# Altium PCB T245_1v1.PcbDoc (part 1 of 2)
Units mm, origin at the board's own origin, x right, y up, seen from the top; angles counter-clockwise.
Board outline 126 x 115 mm, 2 copper layers (Top Layer, Bottom Layer); 137 components, 88 nets, 465 pads, 274 vias.
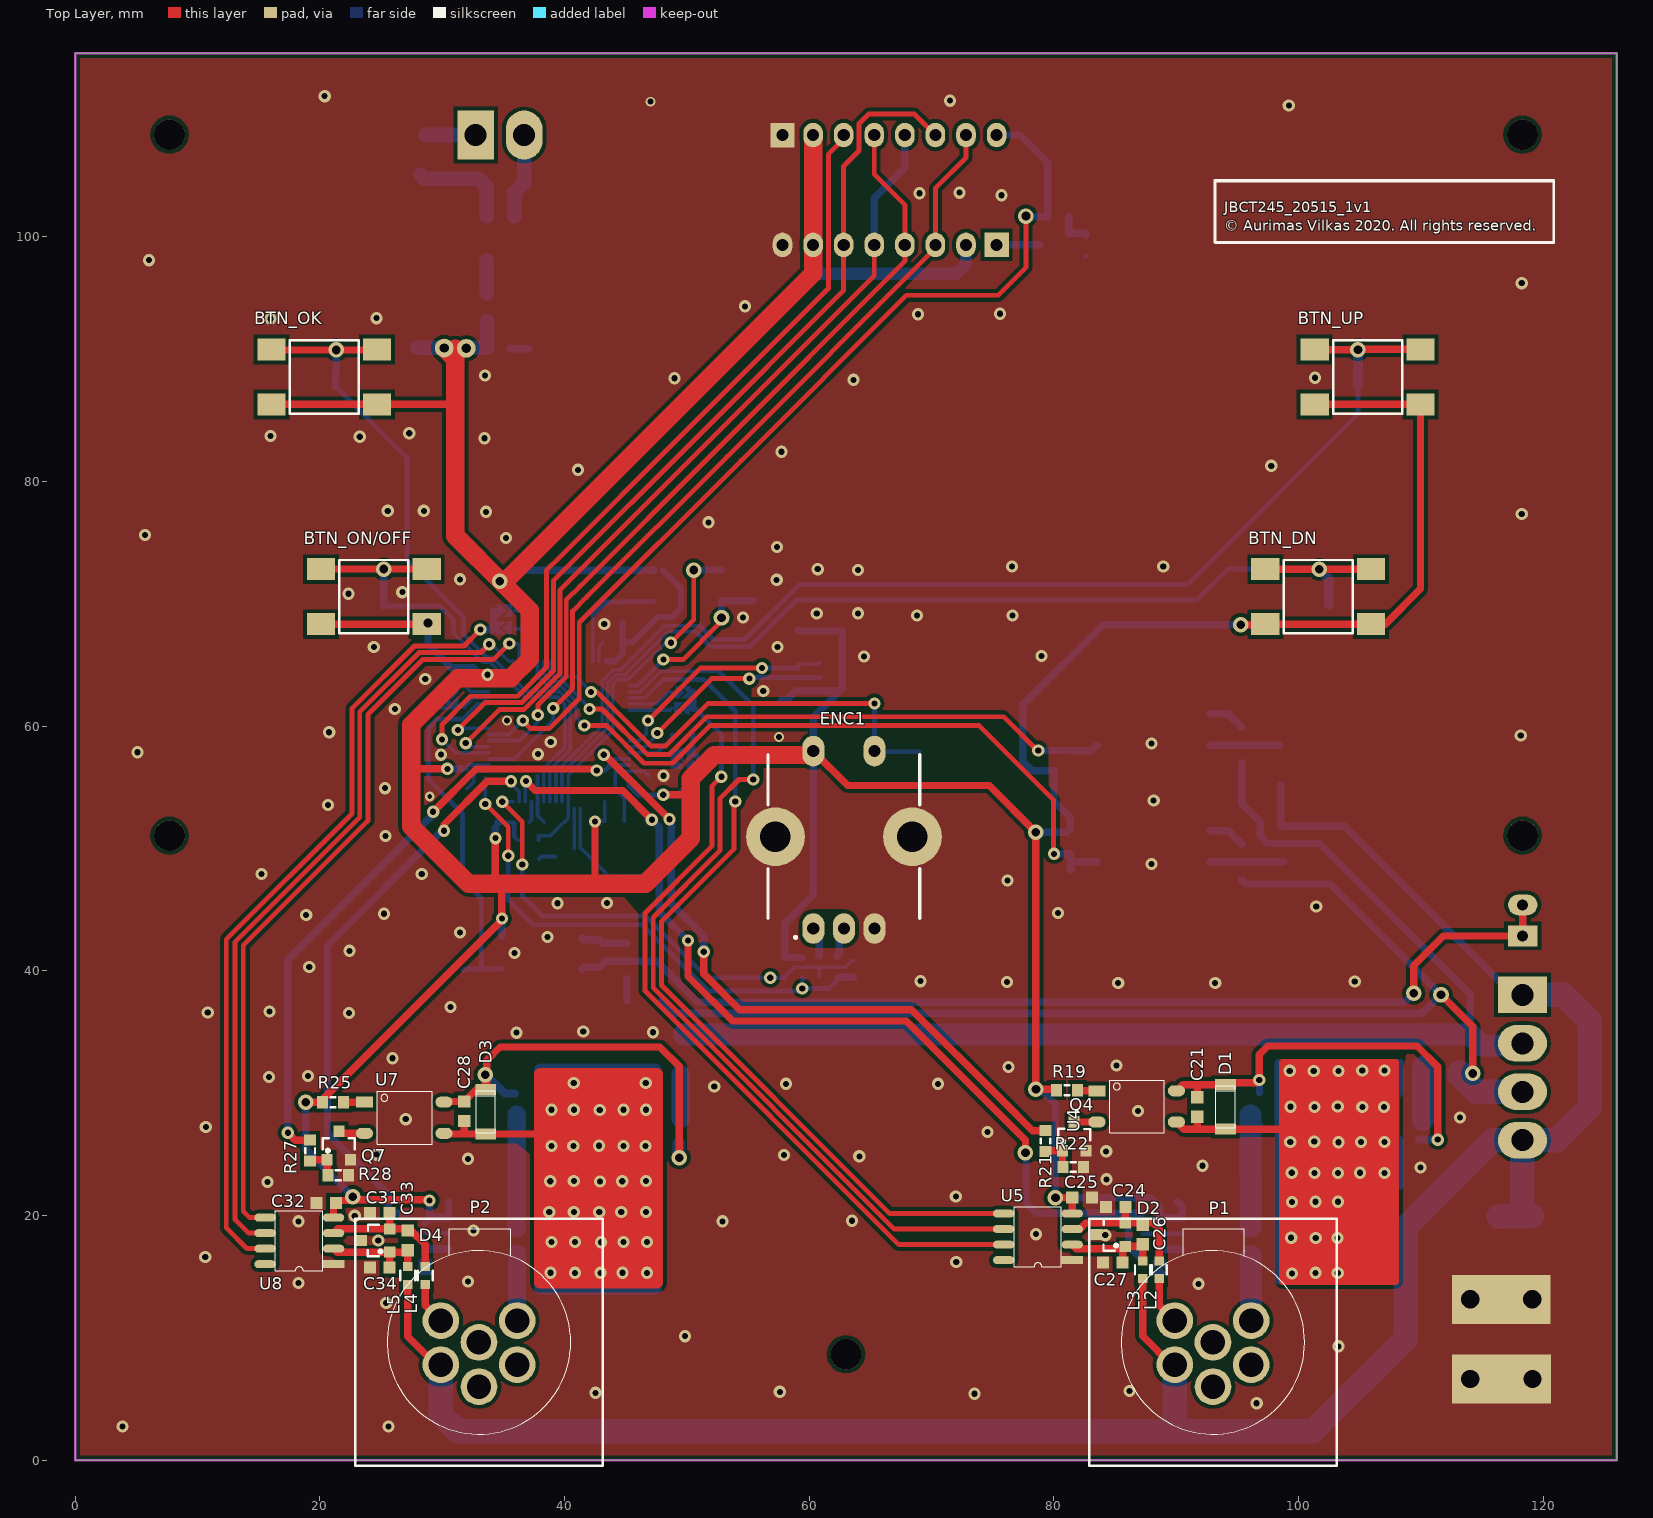
[diagram p0: Top Layer view]
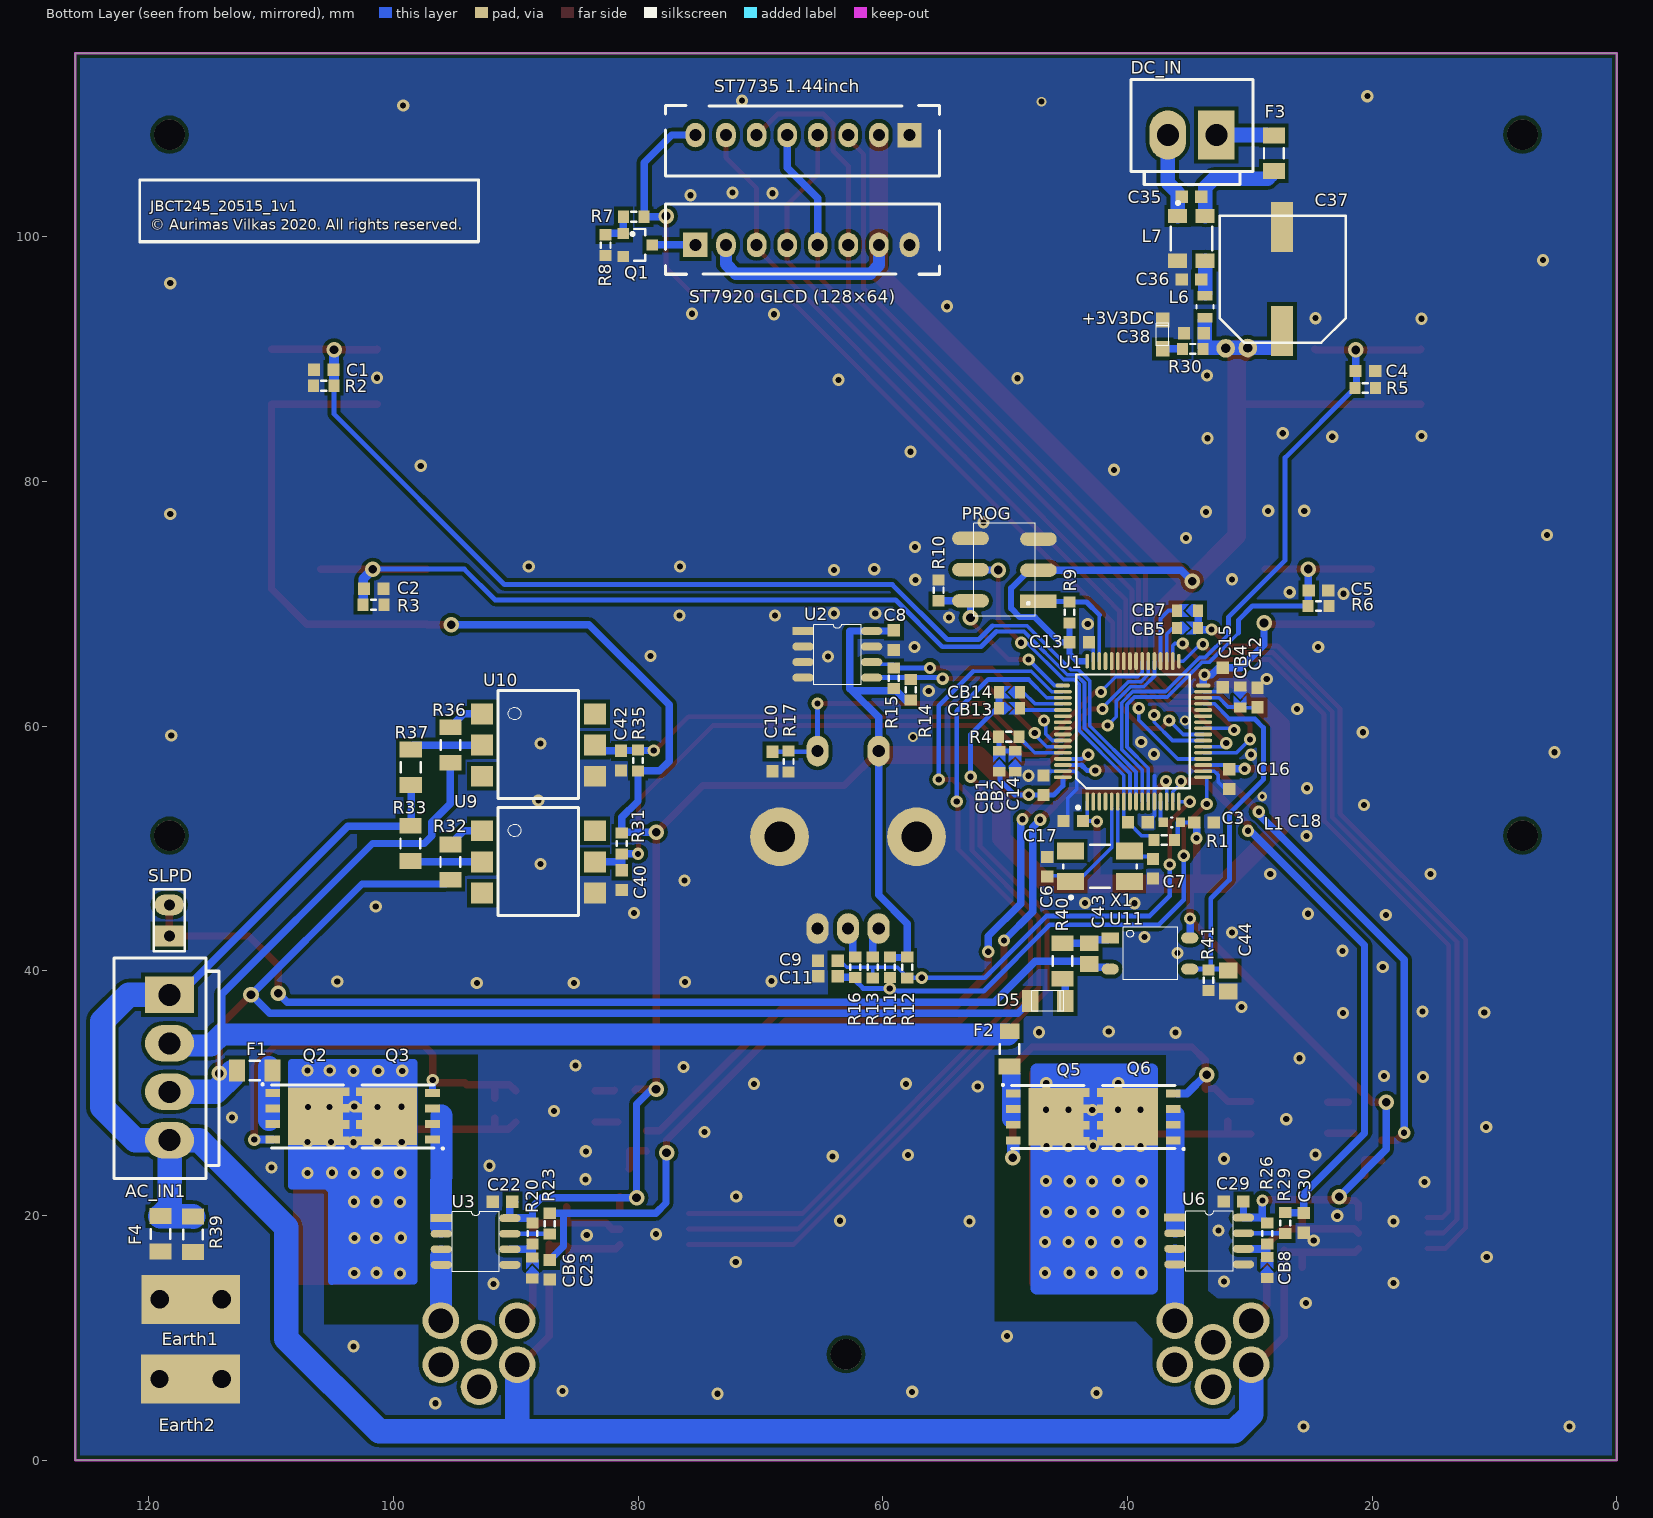
[diagram p1: Bottom Layer view, seen from below]
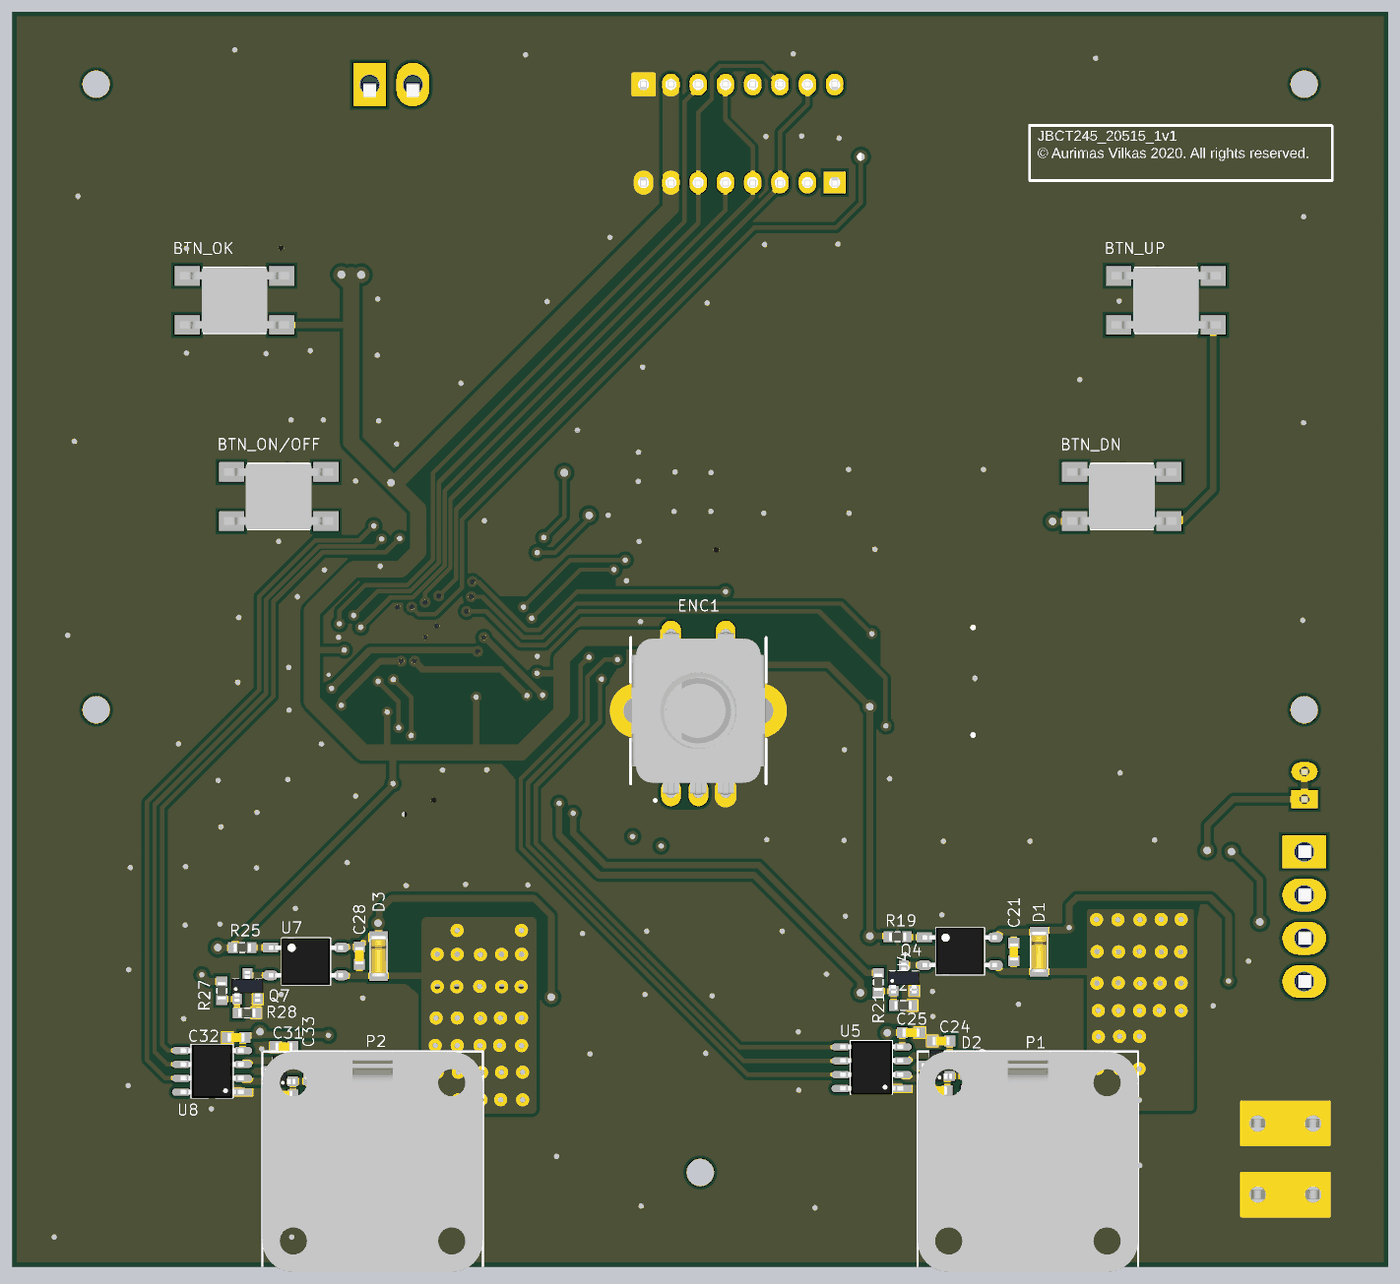
[diagram p3: 3D render of the assembled board from above, using the file's embedded part models]
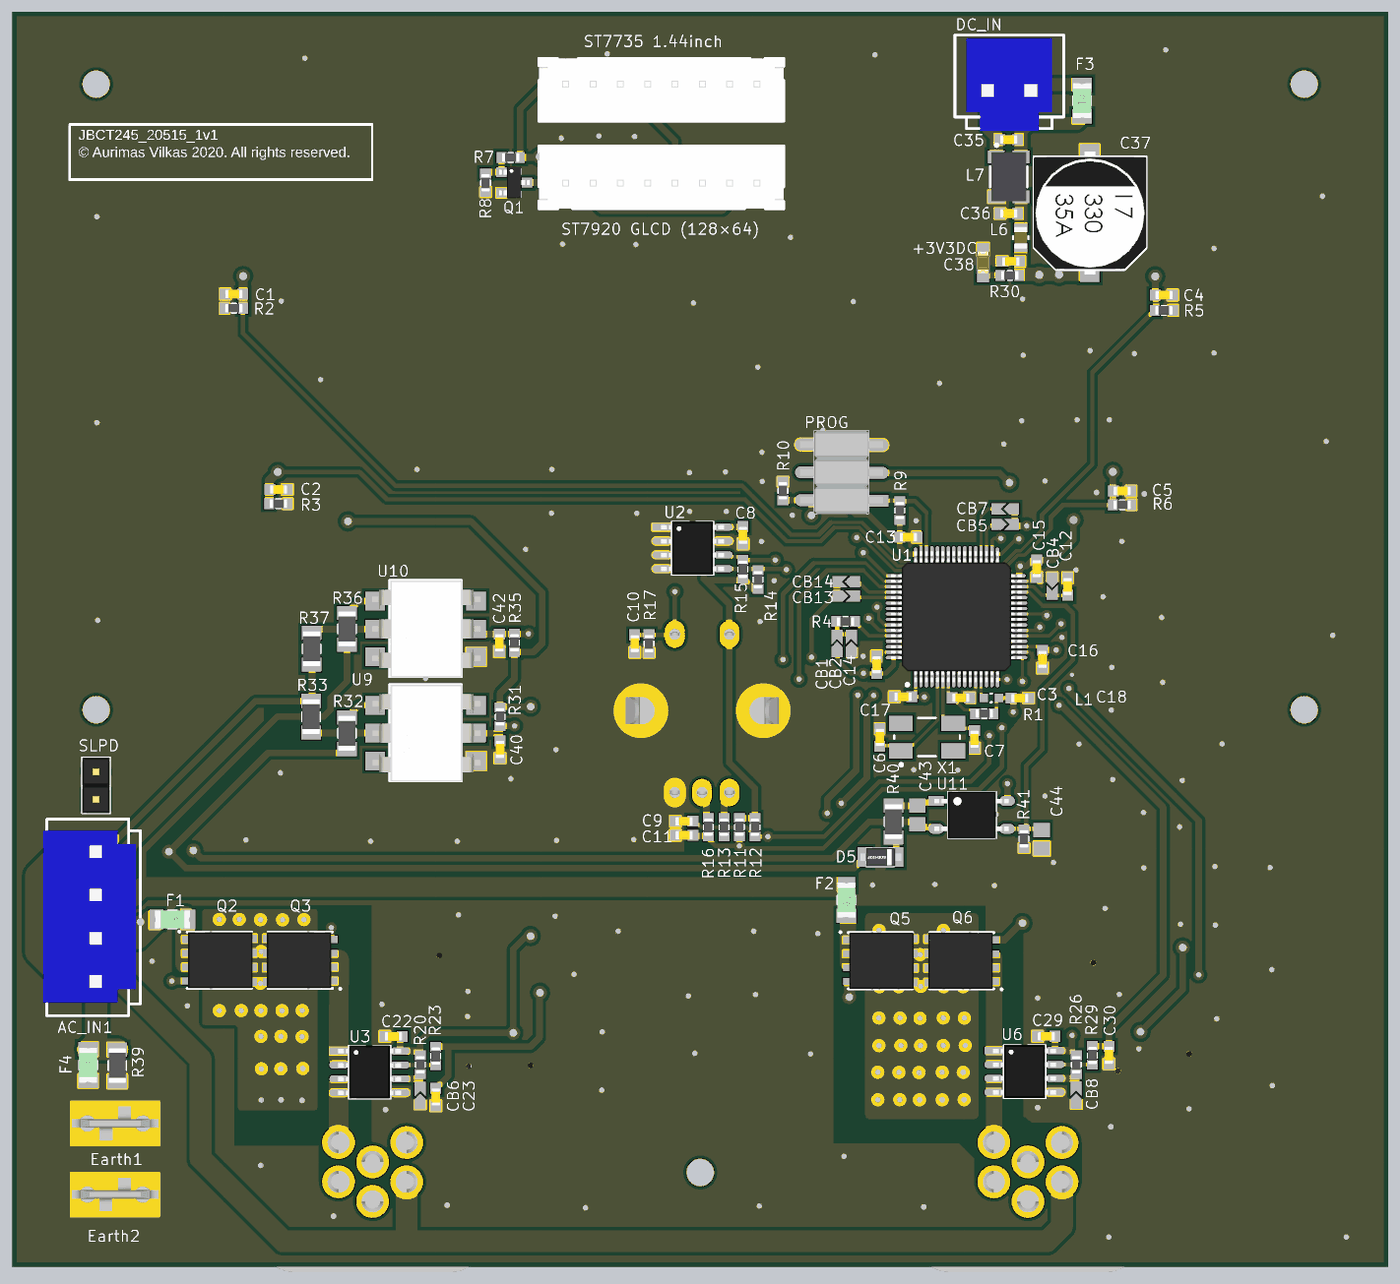
[diagram p4: 3D render of the assembled board from below, using the file's embedded part models]

## Layer stack, top to bottom
Top Solder: solder mask 0.0102, Solder Resist, Dk 3.5
Top Layer: signal copper 0.0356
Dielectric 1: dielectric 0.32, FR-4, Dk 4.8
Bottom Layer: signal copper 0.0356
Bottom Solder: solder mask 0.0102, Solder Resist, Dk 3.5

## Board outline
0,0 126,0 126,115 0,115

## Design rules (kind name [scope] priority, off if disabled: settings)
Clearance [All] p1: gap=0.3 ignorepadtopadclearanceinfootprint=FALSE
ComponentClearance [All] p1: gap=0 collisioncheckmode=3 verticalgap=2540 showdistances=FALSE
Height [All] p1: minheight=0 maxheight=50 prefheight=12.7
PolygonConnect [All] p1: connectstyle=Direct reliefconductorwidth=0.254 reliefentries=4 polygonreliefangle="90 Angle" airgapwidth=0.254
RoutingVias [All] p1: holewidth=0.711 width=1.27 viastyle="Through Hole" minholewidth=0.711 minwidth=1.27 maxholewidth=0.711 maxwidth=1.27
SolderMaskExpansion [All] p1: expansion=0.102
UnRoutedNet [All] p1: checkbadconnections=TRUE
Width [All] p1: maxlimit=10 minlimit=0.1 preferedwidth=0.3 minimp=50.000000 maximp=50.000000 favimp=50.000000
27 further rules are at their usual default settings.

## Classes and differential pairs
component class T245_1v1: AC_IN1 C43 C44 D5 DC_IN Earth1 Earth2 F4 R39 R40 R41 SLPD U11
component class Power_Supply: +3V3DC C35 C36 C37 C38 C40 C42 F3 L6 L7 LED1 R30 R31 R32 R33 R35 R36 R37 U9 U10
component class Power_Driver_2: C28 C29 C30 C31 C32 C33 C34 CB8 D3 D4 F2 L4 L5 P2 Q5 Q6 Q7 R25 R26 R27 R28 R29 U6 U7 U8
component class Power_Driver_1: C21 C22 C23 C24 C25 C26 C27 CB6 D1 D2 F1 L2 L3 P1 Q2 Q3 Q4 R19 R20 R21 R22 R23 U3 U4 U5
component class MCU: BTN_DN BTN_OK BTN_ON/OFF BTN_UP C1 C2 C3 C4 C5 C6 C7 C8 C9 C10 C11 C12 C13 C14 C15 C16 C17 C18 CB1 CB2 CB4 CB5 CB7 CB13 CB14 ENC1 L1 PROG Q1 R1 R2 R3 R4 R5 R6 R7 R8 R9 R10 R11 R12 R13 R14 R15 R16 R17 "ST7735 1.44inch" "ST7920 GLCD (128×64)" U1 U2 X1

## Components (designator, comment, footprint, x,y, rotation, side; value= is the part's Value field where it differs from the comment)
+3V3DC "Green LED" LED_GRN 37.11,92.02 r90 bottom
AC_IN1 "HDR1X4" HDR1X4_3M96V 118.3,32.09 r270 bottom
BTN_DN "Button" PB-6X6mm 101.6,70.58 r180 top
BTN_OK "Button" PB-6X6mm 20.35,88.55 r180 top
BTN_ON/OFF "Button" PB-6X6mm 24.4,70.58 r180 top
BTN_UP "Button" PB-6X6mm 105.64,88.55 r180 top
C1 "10nF" CAPC1608N 105.7,89.13 r0 bottom
C2 "10nF" CAPC1608N 101.6,71.23 r180 bottom
C3 "100nF" CAPC1608N 39.137,52.14 r0 bottom
C4 "10nF" CAPC1608N 20.54,89.04 r180 bottom
C5 "10nF" CAPC1608N 24.37,71.09 r180 bottom
C6 "18p" CAPC1608N 46.557,48.51 r270 bottom
C7 "18p" CAPC1608N 37.897,48.34 r90 bottom
C8 "100nF" CAPC1608N 59.09,67.03 r90 bottom
C9 "10nF" CAPC1608N 64.48,40.83 r0 bottom
C10 "10nF" CAPC1608N 69,57.11 r270 bottom
C11 "10nF" CAPC1608N 64.47,39.55 r0 bottom
C12 "4u7F" CAPC1608N 29.36,62.34 r270 bottom
C13 "100nF" CAPC1608N 43.937,66.86 r0 bottom
C14 "100nF" CAPC1608N 46.857,55.17 r270 bottom
C15 "100nF" CAPC1608N 32.197,63.97 r90 bottom
C16 "100nF" CAPC1608N 31.67,55.67 r90 bottom
C17 "100nF" CAPC1608N 44.43,52.24 r180 bottom
C18 "100nF" CAPC1608N 33.737,52.12 r0 bottom
C21 "100nF" CAPC1608N 91.71,28.86 r90 top
C22 "100nF" CAPC1608N 91.08,21.12 r180 bottom
C23 "10nF" CAPC1608N 87.21,15.56 r270 bottom
C24 "100nF" CAPC1608N 85.05,20.7 r180 top
C25 "100nF" CAPC1608N 82.3,21.47 r0 top
C26 "10nF" CAPC1608N 87.26,18.44 r270 top
C27 "100nF" CAPC1608N 84.81,16.16 r0 top
C28 "100nF" CAPC1608N 31.79,28.52 r90 top
C29 "100nF" CAPC1608N 31.32,21.13 r180 bottom
C30 "10nF" CAPC1608N 25.58,19.39 r270 bottom
C31 "100nF" CAPC1608N 24.89,20.18 r180 top
C32 "100nF" CAPC1608N 20.51,21.02 r180 top
C33 "10nF" CAPC1608N 27.17,17.96 r270 top
C34 "100nF" CAPC1608N 24.89,15.75 r0 top
C35 "100nF" CAPC1608N 34.76,103.28 r180 bottom
C36 "100nF" CAPC1608N 34.76,96.51 r180 bottom
C37 "470uF 25V" 10X10.5 27.35,96.55 r270 bottom
C38 "100nF" CAPC1608N 34.56,92.12 r180 bottom
C40 "10nF" CAPC1608N 81.33,47.41 r270 bottom
C42 "10nF" CAPC1608N 81.39,57.18 r270 bottom
C43 "1uF 50V" CAPC2012N 43.11,41.4 r270 bottom
C44 "1uF 50V" CAPC2012N 31.74,39.17 r270 bottom
CB1 "Open" CB_0603 50.47,57.13 r270 bottom
CB2 "Closed" CB_0603 49.17,57.13 r270 bottom
CB4 "Open" CB_0603 30.787,62.37 r90 bottom
CB5 "Closed" CB_0603 35.07,68.02 r0 bottom
CB6 "Open" CB_0603 88.64,15.71 r270 bottom
CB7 "Open" CB_0603 35.07,69.45 r180 bottom
CB8 "Open" CB_0603 28.58,15.75 r270 bottom
CB13 "Open" CB_0603 49.62,61.46 r0 bottom
CB14 "Closed" CB_0603 49.63,62.77 r180 bottom
D1 "12V" SOD-80C 94.02,28.87 r90 top
D2 "NUP2105LT1G" SOT23-3 85.83,17.48 r90 top
D3 "12V" SOD-80C 33.55,28.48 r90 top
D4 "NUP2105LT1G" SOT23-3 25.7,17 r90 top
D5 "1N4148W" SOD-123F 46.5,37.54 r0 bottom
DC_IN "HDR1X2" HDR1X2_3M96V 34.71,108.32 r0 bottom
Earth1 "Blade Header" "Blade header" 116.57,13.14 r180 bottom
Earth2 "Blade Header" "Blade header" 116.578,6.63 r180 bottom
ENC1 "PEC11R-4225F-S0024" PEC12R-4XXXF-SXXXX_1 62.83,50.96 r0 top
F1 "8A" 1206F#1 111.33,31.84 r0 bottom
F2 "8A" 1206F#2 49.62,33.61 r90 bottom
F3 "1.5A Fuse" 1206F#1 28.03,106.84 r270 bottom
F4 "1.5A Fuse" 1206F#1 119.04,18.49 r270 bottom
L1 "BLM18A" 0603L 36.36,52.13 r0 bottom
L2 "BLM18PG471SN1D" LL0603\2P 88.61,15.56 r270 top
L3 "BLM18PG471SN1D" LL0603\2P 87.25,15.56 r90 top
L4 "BLM18PG471SN1D" LL0603\2P 28.61,15.09 r270 top
L5 "BLM18PG471SN1D" LL0603\2P 27.17,15.09 r90 top
L6 "220R 2A" LL0805\2P 33.66,94.28 r270 bottom
L7 "300nH 2A" 1812_CM_WE 34.76,99.87 r270 bottom
P1 "6 Pin circular conn" RPC1-12RB-6P(71) 93,8.7 r0 top
P2 "6 Pin circular conn" RPC1-12RB-6P(71) 33,8.7 r0 top
PROG "PROG" B6B_SMT 50.047,72.77 r0 bottom
Q1 "FMMT493ATA" SOT23-3 81.2,100.29 r270 bottom
Q2 "BSC070N10NS3GATMA1" PG-TDSON-8 106.35,28.1 r270 bottom
Q3 "BSC070N10NS3GATMA1" PG-TDSON-8 100.3,28.1 r90 bottom
Q4 "FMMT493ATA" SOT23-3 80.7,25.29 r0 top
Q5 "BSC070N10NS3GATMA1" PG-TDSON-8 45.83,28.05 r270 bottom
Q6 "BSC070N10NS3GATMA1" PG-TDSON-8 39.74,28.05 r90 bottom
Q7 "FMMT493ATA" SOT23-3 20.59,24.54 r0 top
R1 "100k" RESC1608N 36.99,50.69 r180 bottom
R2 "10k" RESC1608N 105.7,87.83 r180 bottom
R3 "10k" RESC1608N 101.62,69.93 r0 bottom
R4 "100k" RESC1608N 49.69,59.13 r180 bottom
R5 "10k" RESC1608N 20.55,87.64 r0 bottom
R6 "10k" RESC1608N 24.37,69.82 r0 bottom
R7 "220R" RESC1608N 80.35,101.64 r0 bottom
R8 "1k" RESC1608N 82.65,99.32 r90 bottom
R9 "10k" RESC1608N 44.73,69.3 r270 bottom
R10 "10k" RESC1608N 55.43,71.1 r270 bottom
R11 "10k" RESC1608N 59.41,40.29 r90 bottom
R12 "10k" RESC1608N 57.99,40.28 r90 bottom
R13 "10k" RESC1608N 60.82,40.28 r90 bottom
R14 "10k" RESC1608N 59.09,63.91 r270 bottom
R15 "10k" RESC1608N 57.71,62.97 r270 bottom
R16 "10k" RESC1608N 62.25,40.29 r90 bottom
R17 "10k" RESC1608N 67.69,57.11 r90 bottom
R19 "68R" RESC1608N 81.07,30.24 r180 top
R20 "10k" RESC1608N 88.63,18.53 r270 bottom
R21 "220R" RESC1608N 79.31,26.08 r270 top
R22 "1k" RESC1608N 81.57,23.96 r180 top
R23 "100R" RESC1608N 87.21,19.33 r270 bottom
R25 "68R" RESC1608N 21.07,29.25 r180 top
R26 "10k" RESC1608N 28.57,18.53 r270 bottom
R27 "220R" RESC1608N 19.19,25.3 r270 top
R28 "1k" RESC1608N 21.5,23.28 r180 top
R29 "100R" RESC1608N 27.09,19.38 r270 bottom
R30 "68R" RESC1608N 34.66,90.84 r180 bottom
R31 "10k" RESC1608N 81.33,50.4 r90 bottom
R32 "1k5 1/2W" RESC3216N 95.35,48.89 r90 bottom
R33 "1k5 1/2W" RESC3216N 98.62,50.41 r270 bottom
R35 "10k" RESC1608N 80.01,57.19 r270 bottom
R36 "1k5 1/2W" RESC3216N 95.34,58.46 r90 bottom
R37 "1k5 1/2W" RESC3216N 98.58,56.63 r90 bottom
R39 "10M" RESC3216N 116.37,18.45 r90 bottom
R40 "1k5 1/2W" RESC3216N 45.3,40.8 r90 bottom
R41 "10k" RESC1608N 33.36,39.22 r90 bottom
SLPD "Sleep_Det" HDR1X2_2.54mm 118.32,42.85 r90 bottom
"ST7735 1.44inch" "ST7735 1.44inch" "B8B-XH-A (LF)(SN)" 57.81,108.32 r0 bottom
"ST7920 GLCD (128×64)" "ST7920 GLCD (128×64)" "B8B-XH-A (LF)(SN)" 75.31,99.34 r180 bottom
U1 "STM32F446RCT6" LQFP-64N 39.537,59.57 r90 bottom
U2 "24LC256-E/SN" SOIC-8 63.708,65.869 r180 bottom
U3 "ACS711KLCTR-12AB-T" SOIC-8 93.28,17.87 r180 bottom
U4 "VOM1271T" SOP-4 86.76,28.915 r0 top
U5 "MAX31855KASA+T" SOIC-8 78.69,18.25 r180 top
U6 "ACS711KLCTR-12AB-T" SOIC-8 33.31,17.91 r180 bottom
U7 "VOM1271T" SOP-4 26.89,27.99 r0 top
U8 "MAX31855KASA+T" SOIC-8 18.31,17.92 r180 top
U9 "H11AA1SR2M" SMDIP-6 88.06,48.9 r180 bottom
U10 "H11AA1SR2M" SMDIP-6 88.07,58.45 r180 bottom
U11 "TLP185SE" SOP-4 38.15,41.415 r180 bottom
X1 "8 MHz" 2SMX-3SMXB 42.237,48.54 r180 bottom

## Footprints (in the part's own frame and the unit in brackets; to place one, negate y for a bottom-side part, rotate by r counter-clockwise, add the part's x,y. Pads: shape width x height; smd on the part's side, far side on the other; paste and mask are expansions set on the pad)
2SMX-3SMXB [mm] "Quartz Crystal, SM; Body 6.0 x 3.5 mm (LxW)"
  rect 2.2x1.4 smd: 1(-2.4,-1.25) 2(2.4,-1.25) 3(2.4,1.25) 4(-2.4,1.25)
  silkscreen extent -3,-2.66 3,1.75, body extent -3.01,-1.76 3.01,1.76, height 1
10X10.5 [mm] "MCVVT025M471GB3L"
  rect 4.1x1.8 smd: 1(4.263,0) 2(-4.262,0)
  silkscreen extent -5.17,-5.11 5.2,5.19, body extent -5.65,-5.11 5.65,5.19, height 10.61
0603L [mil] "Bead 0603L"
  rect 30x30 smd: 1(27.5,0) 2(-27.5,0)
  silkscreen extent -2,-16 2,16, body extent -34,-19 34,19, height 24
1206F#1 [mm] "Fuse, Surface Mount, 1.5 A, 32 V, Fast Acting, 1206"
  rect 1.3x1.8 smd: 1(-1.45,0) 2(1.45,0)
  silkscreen extent -0.4,-0.8 0.4,0.8, body extent -1.6,-0.83 1.6,0.83, height 0.56
1206F#2 [mm] "Fuse, Surface Mount, 1.5 A, 32 V, Fast Acting, 1206"
  rect 1.3x1.8 smd: 1(-1.45,0)
  rect 1.3x1.6 smd: 2(1.45,0)
  silkscreen extent -0.4,-0.8 0.4,0.8, body extent -1.6,-0.83 1.6,0.83, height 0.56
1812_CM_WE [mm] "744235900 -  Filter, Line, Common Mode, 300 nH, WE-CNSW Series, 90 ohm, 2 A, 4.5mm x 3.2mm x 2.8mm"
  rect 1.15x1.55 smd: 1(-1.825,-1.125) 2(1.825,-1.125) 3(1.825,1.125) 4(-1.825,1.125)
  silkscreen extent -3.02,-1.7 0.95,1.7, body extent -2.25,-1.6 2.25,1.6, height 2.84
B6B_SMT [mm]
  rect 3x1.1 smd: 1(-2.775,2.575)
  oval 3x1.1 smd: 2(2.775,2.525) 3(-2.775,0.025) 4(2.775,-0.025) 5(-2.775,-2.525) 6(2.775,-2.575)
  silkscreen extent -2.52,-3.83 2.52,3.79, body extent -3.81,-3.83 3.81,3.79, height 10.2
"B8B-XH-A (LF)(SN)" [mm]
  rect 2x2 hole 1: 1(0,0)
  oval 1.6x2 hole 1: 2(2.5,0) 3(5,0) 4(7.5,0) 5(10,0) 6(12.5,0) 7(15,0) 8(17.5,0)
  silkscreen extent -2.45,-2.4 19.95,3.35, body extent -2.45,-2.4 19.95,3.35, height 7.4
"Blade header" [mm]
  rect 3x4 hole 1.5: 1(-2.537,0) 1(2.538,0)
  rect 3x4 all layers, no hole: 1(0.013,0)
  body extent -3.95,-1.54 3.97,1.55, height 10.6
CAPC1608N [mm] "Chip Capacitor, Body 1.6x0.8mm(0603), IPC Medium Density"
  rect 1x1 smd: 1(-0.8,0) 2(0.8,0)
  body extent -0.8,-0.4 0.8,0.4, height 0.55
CAPC2012N [mm] "Chip Capacitor, Body 2.0x1.3mm(C0805), IPC Medium Density"
  rect 1.3x1.5 smd: 1(-0.85,0) 2(0.85,0)
  body extent -1.1,-0.72 1.1,0.72, height 1.1
CB_0603 [mil] "Jumper"
  rect 32x40 smd: 1(33.75,0) 2(-33.75,0)
  Top Layer region: -26.25,0 -16.25,0 3.75,-20 -26.25,-20
  Top Layer region: -26.25,0 -16.25,0 3.75,20 -26.25,20
  Top Layer region: 23.75,20 13.75,20 -6.25,0 13.75,-20 23.75,-20
HDR1X2_2.54mm [mm] "Straight pin header, 2.54mm pitch, hole 0.9mm"
  rect 1.7x2.4 hole 0.9: 1(0,0)
  oval 1.7x2.4 hole 0.9: 2(2.54,0)
  silkscreen extent -1.27,-1.27 3.81,1.27, body extent -1.29,-1.27 3.79,1.27, height 8.49
HDR1X2_3M96V [mm]
  rect 3x4 hole 1.8: 1(-1.98,0)
  oval 3x4 hole 1.8: 2(1.98,0)
  silkscreen extent -4.98,-4.53 4.98,4.03, body extent -3.93,-4.25 3.93,4.25, height 10.9
HDR1X4_3M96V [mm]
  rect 3x4 hole 1.8: 1(-5.94,0)
  oval 3x4 hole 1.8: 2(-1.98,0) 3(1.98,0) 4(5.94,0)
  silkscreen extent -8.94,-4.53 9.06,4.03, body extent -7.89,-4.86 7.89,3.64, height 10.9
LED_GRN [mm] "0805"
  rect 1.25x1.1 smd: 1(-1.175,0) 2(1.175,0)
  silkscreen extent -0.91,-0.5 0.9,0.53, body extent -1.01,-0.63 1.01,0.62, height 1.1
LL0603\2P [mm]
  rect 0.75x0.8 smd: 1(-0.725,0) 2(0.725,0)
  silkscreen extent -0.38,-0.63 0.38,0.63, body extent -0.8,-0.4 0.8,0.4, height 0.4
LL0805\2P [mm]
  rect 0.8x1.25 smd: 1(-0.9,0) 2(0.9,0)
  silkscreen extent -0.15,-0.7 0.15,0.7, body extent -1,-0.6 1,0.6, height 0.95
LQFP-64N [mm] "STM32F446RET6"
  rect 1.475x0.3 smd: 1(-5.738,3.75)
  oval 1.475x0.3 smd: 2(-5.738,3.25) 3(-5.738,2.75) 4(-5.738,2.25) 5(-5.738,1.75) 6(-5.738,1.25) 7(-5.738,0.75) 8(-5.738,0.25) 9(-5.738,-0.25) 10(-5.738,-0.75) 11(-5.738,-1.25) 12(-5.738,-1.75) 13(-5.738,-2.25) 14(-5.738,-2.75) 15(-5.738,-3.25) 16(-5.738,-3.75) 34(5.738,-3.25) 35(5.738,-2.75) 36(5.738,-2.25) 37(5.738,-1.75) 38(5.738,-1.25) 39(5.738,-0.75) 40(5.738,-0.25) 41(5.738,0.25) 42(5.738,0.75) 43(5.738,1.25) 44(5.738,1.75) 45(5.738,2.25) 46(5.738,2.75) 47(5.738,3.25)
  oval 0.3x1.475 smd: 17(-3.75,-5.738) 18(-3.25,-5.738) 19(-2.75,-5.738) 20(-2.25,-5.738) 21(-1.75,-5.738) 22(-1.25,-5.738) 23(-0.75,-5.738) 24(-0.25,-5.738) 25(0.25,-5.738) 26(0.75,-5.738) 27(1.25,-5.738) 28(1.75,-5.738) 29(2.25,-5.738) 30(2.75,-5.738) 31(3.25,-5.738) 50(3.25,5.738) 51(2.75,5.738) 52(2.25,5.738) 53(1.75,5.738) 54(1.25,5.738) 55(0.75,5.738) 56(0.25,5.738) 57(-0.25,5.738) 58(-0.75,5.738) 59(-1.25,5.738) 60(-1.75,5.738) 61(-2.25,5.738) 62(-2.75,5.738) 63(-3.25,5.738) 64(-3.75,5.738)
  oval 0.3x1.2 smd: 32(3.75,-5.738) 49(3.75,5.738)
  oval 1.2x0.3 smd: 33(5.738,-3.75) 48(5.738,3.75)
  silkscreen extent -6.35,-4.65 4.65,4.65, body extent -6,-6 6,6, height 1.6
PB-6X6mm [mm] "Surface Mounting Type Tact Switch, 4-Leads, Body 6x6mm, Height 4.5mm Black"
  rect 2.3x1.8 smd: 1(4.325,2.25) 2(4.325,-2.25) 3(-4.325,-2.25) 4(-4.325,2.25)
  silkscreen extent -2.83,-3 2.81,3, body extent -5,-3 5,3, height 4.71
PEC12R-4XXXF-SXXXX_1 [mm]
  oval 1.8x2.5 hole 1: 1(-2.5,-7.5) 2(2.5,-7.5) 3(0,-7.5) 4(-2.5,7) 5(2.5,7)
  round 4.8 hole 2.5: 6(5.6,0) 7(-5.6,0)
  silkscreen extent -6.2,-8.31 6.2,6.7, body extent -7,-7.7 7,7.2, height 31.7
PG-TDSON-8 [mm]
  rect 0.65x1.2 smd: 1(1.905,-3.5) 2(-1.905,-3.5) 2(-0.635,-3.5) 2(0.635,-3.5)
  rect 0.7x0.5 smd: 3(-2,2.5) 3(-0.665,2.5) 3(0.665,2.5) 3(2,2.5)
  rect 4.7x4.5 smd: 3(0,0)
  silkscreen extent -2.66,-4.39 2.58,2.27, body extent -2.67,-3.65 2.68,2.5, height 1
RESC1608N [mm] "Chip Resistor, Body 1.6x0.8mm, IPC Medium Density"
  rect 0.9x1 smd: 1(-0.85,0) 2(0.85,0)
  silkscreen extent -0.2,-0.4 0.2,0.4, body extent -0.8,-0.4 0.8,0.4, height 0.38
RESC3216N [mm] "Chip Resistor, Body 3.2x1.6mm, IPC Medium Density"
  rect 1.3x1.8 smd: 1(-1.45,0) 2(1.45,0)
  silkscreen extent -0.4,-0.8 0.4,0.8, body extent -1.6,-0.8 1.6,0.8, height 0.6
RPC1-12RB-6P(71) [mm] "RPC1-12RB-6P(71) -  Circular Connector, RP Series, Panel Mount Receptacle, 6 Contacts, Solder Pin"
  round 3 hole 2: 1(-3.12,2.7) 2(-3.12,-0.9) 3(0,-2.7) 4(3.12,-0.9) 5(3.12,2.7) 6(-0.005,0.925)
  silkscreen extent -10.1,-9.17 10.1,11.03, body extent -10.1,-9.17 10.1,11.03, height 23.5
SMDIP-6 [mm] "H11AA1SR2M"
  rect 1.8x1.7 smd: 1(-4.7,2.55) 2(-4.7,0) 3(-4.7,-2.55) 4(4.55,-2.55) 5(4.55,0) 6(4.55,2.55)
  silkscreen extent -3.37,-4.37 3.2,4.45, body extent -4.95,-4.44 4.95,4.45, height 5.08
SOD-80C [mm]
  rect 0.9x1.7 smd: 1(1.82,0) 2(-1.82,0)
  silkscreen extent -1.72,-0.78 1.72,0.78, body extent -1.87,-0.8 1.83,0.8, height 1.6
SOD-123F [mm]
  rect 1.34x1.8 smd: 1(-1.43,0) 2(1.43,0)
  silkscreen extent -1.3,-0.82 1.32,0.86, body extent -1.9,-0.85 1.85,0.85, height 1.2
SOIC-8 [mm] "FAN7190_F085"
  rect 1.75x0.65 smd: 1(-2.8,1.905)
  oval 1.75x0.65 smd: 2(-2.8,0.635) 3(-2.8,-0.635) 4(-2.8,-1.905) 5(2.8,-1.905) 6(2.8,-0.635) 7(2.8,0.635) 8(2.8,1.905)
  silkscreen extent -1.92,-2.48 1.95,2.43, body extent -2.89,-2.46 2.89,2.45, height 1.45
SOP-4 [mm] "LTV356T"
  rect 1.4x0.9 smd: 1(-3.25,1.275)
  oval 1.4x0.9 smd: 2(-3.25,-1.275) 3(3.25,-1.275) 4(3.25,1.275)
  silkscreen extent -2.2,-2.15 2.27,2.15, body extent -3.4,-2.15 3.4,2.15, height 2.1
SOT23-3 [mm]
  rect 0.9x0.95 smd: 1(0,0) 2(1.9,0) 3(0.95,2.35)
  silkscreen extent -0.35,0.63 2.25,1.78, body extent -0.51,-0.22 2.39,2.58, height 1.3

## Part data
+3V3DC: library part KPT-2012SGC, "KPT-2012SGC -  LED, Low Power, Green, SMD, 2mm x 1.25mm, 20 mA, 2.2 V, 568 nm", Supplier Part Number 1=2099239, Supplier 1=Farnell
AC_IN1: library part J0000151, "CONNECTOR, 4 way , HEADER, THT, 3.96MM,10A,250Vac", Supplier Part Number 1=9492020, Supplier 1=Farnell
BTN_DN BTN_OK BTN_ON/OFF BTN_UP: library part "Tactile PB", "FSM2JRT -  Tactile Switch, Non Illuminated, 24 V, 50 mA, 225 gf, PC Pin, FSM Series", Supplier Part Number 1=2610957, Supplier 1=Farnell
C1 C2 C4 C5 C9 C10 C11 C23 C26 C30 C33 C40 C42: library part C0000009, "MCU0603R103KCT -  SMD Multilayer Ceramic Capacitor, 10000 pF, 50 V, 0603 [1608 Metric], ± 10%, X7R, MCU Series", Supplier Part Number 1=9406182, Supplier 1=Farnell
C3 C8 C13 C14 C15 C16 C17 C18 C21 C22 C24 C25 C27 C28 C29 C31 C32 C34 C35 C36 C38: library part C0000005, "MC0805B104K250CT -  SMD Multilayer Ceramic Capacitor, 0.1 µF, 25 V, 0805 [2012 Metric], ± 10%, X7R, MC Series", Supplier Part Number 1=1759166, Supplier 1=Farnell
C6 C7: library part C0000124, "0603N180J500CT -  SMD Multilayer Ceramic Capacitor, 0603 [1608 Metric], 18 pF, 50 V, ± 5%, C0G / NP0", Supplier Part Number 1=2496890, Supplier 1=Farnell
C12: library part C0000005, "CL10A475KQ8NNNC -  SMD Multilayer Ceramic Capacitor, 4.7 µF, 6.3 V, 0603 [1608 Metric], ± 10%, X5R, CL Series", Supplier Part Number 1=3013399, Supplier 1=Farnell
C37: "MCVVT025M471GB3L -  SMD Aluminium Electrolytic Capacitor, Radial Can - SMD, 470 µF, 25 V, VT, V-Chip Series", Supplier Part Number 1=2611378, Supplier 1=Farnell
C43 C44: library part C0000037, "CL21B105KBFNNNE -  SMD Multilayer Ceramic Capacitor, 1 µF, 50 V, 0805 [2012 Metric], ± 10%, X7R, CL Series", Supplier Part Number 1=3013482, Supplier 1=Farnell
CB1 CB4 CB6 CB7 CB8 CB13: library part "CB Open", "Circuit Breaker"
  CB7 CB13: Revision="July-2002: Re-released for DXP Platform."
CB2 CB5 CB14: library part "CB Closed", "Circuit Breaker"
  CB5 CB14: Revision="July-2002: Re-released for DXP Platform."
D1 D3: "BZT55C12-GS08 -  Zener Single Diode, 12 V, 500 mW, SOD-80 (MiniMELF), 5 %, 2 Pins, 175 °C", Supplier Part Number 1=2690028, Supplier 1=Farnell
D2 D4: "NUP2105LT1G -  TVS Diode, NUP21 Series, Bidirectional, 22 V, 40 V, SOT-23, 3 Pins", Supplier Part Number 1=2101833, Supplier 1=Farnell
D5: "1N4148W -  Small Signal Diode, Single, 75 V, 150 mA, 1 V, 4 ns, 400 mA", Supplier Part Number 1=2677464, Supplier=Farnell
DC_IN: library part J0000152, "CONNECTOR, 2 way , HEADER, THT, 3.96MM,10A,250Vac", Supplier Part Number 1=9492003, Supplier 1=Farnell
Earth1 Earth2: "62409-1 -  PCB Terminal, 6.35mm x 0.81mm, 0.25\" x 0.032\", Brass, 1.4 mm, Tin", Supplier Part Number 1=892609, Supplier 1=Farnell
ENC1: "PEC11R-4225F-S0024 -  Rotary Encoder, Mechanical, Incremental, 24 PPR, 24 Detents, Vertical, With Momentary Push Switch", Supplier Part Number 1=2381866, Supplier 1=Farnell
F1 F2: library part "8A Fuse", "MCCFB1206TFF/8 -  Fuse, Surface Mount, 8 A, 32 V, Fast Acting, 1206", Supplier Part Number 1=2850026, Supplier 1=Farnell
F3 F4: "MCCFB1206TFF/1.5 -  Fuse, Surface Mount, 1.5 A, 32 V, Fast Acting, 1206", Supplier Part Number 1=1652166, Supplier 1=Farnell
L1: library part BLM18AG601SN1D, "BLM18AG601SN1D -  Ferrite Bead, 0603 [1608 Metric], 600 ohm, 500 mA, BLM18A Series, 0.38 ohm, ± 25%", Supplier Part Number 1=1515679, Supplier 1=Farnell
L2 L3 L4 L5: library part L0000158, "BLM18PG471SN1D -  Ferrite Bead, 0603 [1608 Metric], 470 ohm, 1 A, BLM18P Series, 0.2 ohm, ± 25%", Supplier Part Number 1=1515745, Supplier 1=Farnell
L6: library part L0000004, "BLM21PG221SN1D -  Ferrite Bead, 0805 [2012 Metric], 220 ohm, 2 A, BLM21P Series, 0.045 ohm, ± 25%", Supplier Part Number 1=1515661, Supplier 1=Farnell
L7: library part "300 nH", "744235900 -  Filter, Line, Common Mode, 300 nH, WE-CNSW Series, 90 ohm, 2 A, 4.5mm x 3.2mm x 2.8mm", Supplier Part Number 1=2249865, Supplier 1=Farnell
P1 P2: library part RPC1-12RB-6P(71), "RPC1-12RB-6P(71) -  Circular Connector, RP Series, Panel Mount Receptacle, 6 Contacts, Solder Pin", Supplier Part Number 1=1077728, Supplier 1=Farnell
PROG: library part B6B_SMT, "1241050-3 -  Board-To-Board Connector, 2.54 mm, 6 Contacts, Header, AMPMODU MOD II Series, Surface Mount, 2 Rows", Supplier Part Number 1=9689567, Supplier 1=Farnell
Q1 Q4 Q7: "FMMT493ATA -  Bipolar (BJT) Single Transistor, NPN, 60 V, 150 MHz, 500 mW, 1 A, 300 hFE", Supplier Part Number 1=2061448, Supplier 1=Farnell
Q2 Q3 Q5 Q6: "BSC070N10NS3GATMA1 -  Power MOSFET, N Channel, 100 V, 90 A, 0.0063 ohm, TDSON, Surface Mount", Supplier Part Number 1=2443421, Kitron=4084118, Supplier 1=Farnell
R1 R4: library part R2406120, "MCWR06X1003FTL -  SMD Chip Resistor, 0603 [1608 Metric], 100 kohm, MCWR Series, 50 V, Thick Film, 100 mW", Supplier Part Number 1=2447226RL, Supplier 1=Farnell
R2 R3 R5 R6 R9 R10 R11 R12 R13 R14 R15 R16 R17 R20 R26 R31 R35 R41: library part R0000008, "MCWR06X1002FTL -  SMD Chip Resistor, 0603 [1608 Metric], 10 kohm, MCWR Series, 50 V, Thick Film, 100 mW", Supplier Part Number 1=2447230, Supplier 1=Farnell
R7 R21 R27: library part R2406056, "CRGH0603F220R -  SMD Chip Resistor, 220 ohm, CRG Series, 50 V, Thick Film, 0603 [1608 Metric], 200 mW", Supplier Part Number 1=2331993, Supplier 1=Farnell
R8 R22 R28: library part R2406056, "CRGH0603F1K0 -  SMD Chip Resistor, 1 kohm, CRG Series, 50 V, Thick Film, 0603 [1608 Metric], 200 mW", Supplier Part Number 1=2332003, Supplier 1=Farnell
R19 R25 R30: library part R0000002, "MCSR06X68R0FTL -  SMD Chip Resistor, 68 ohm, MCSR 06 Series, 75 V, Ceramic, 0603 [1608 Metric], 100 mW", Supplier Part Number 1=2074301, Supplier 1=Farnell
R23 R29: library part R2406048, "MCHVR03JTEX1000 -  SMD Chip Resistor, High Voltage, 100 ohm, HVR Series, 200 V, Thick Film, 0603 [1608 Metric], 100 mW", Supplier Part Number 1=2825696, Supplier 1=Farnell
R32 R33 R36 R37 R40: library part R2412076, "MCWF12P1501FTL -  SMD Chip Resistor, 1206 [3216 Metric], 1.5 kohm, MCWF12P Series, 200 V, Thick Film, 500 mW", Supplier Part Number 1=2694448, Supplier 1=Farnell
R39: library part R2412168, "CRGCQ1206J10M -  SMD Chip Resistor, 1206 [3216 Metric], 10 Mohm, CRGCQ Series, 200 V, Thick Film, 250 mW", Supplier Part Number 1=2861974, Supplier 1=Farnell
SLPD: library part J0000013, "2 header, 2.54mm", Supplier Part Number 1=1248140, Supplier 1=Farnell
"ST7735 1.44inch" "ST7920 GLCD (128×64)": library part B8B-XH-A, "B8B-XH-A (LF)(SN) -  Wire-To-Board Connector, Vertical, 2.5 mm, 8 Contacts, Header, XH Series, Through Hole, 1 Rows", Supplier Part Number 1=1516284, Supplier 1=Farnell
U1: library part STM32F446RCT6TR, "STM32F446RCT6 -  ARM MCU, High Performance, STM32 Family STM32F4 Series Microcontrollers, ARM Cortex-M4, 32bit", Supplier Part Number 1=2488309, Kitron=4110530, Supplier 1=Farnell
U2: "24LC256-E/SN -  EEPROM, 256 Kbit, 32K x 8bit, Serial I2C (2-Wire), 400 kHz, SOIC, 8 Pins", Supplier Part Number 1=1579573, Supplier 1=Farnell
U3 U6: "ACS711KLCTR-12AB-T -  Current Sensor, Overcurrent Fault, 4 mA, 100 kHz, SOIC, 8 Pins, 3 V, 5.5 V", Supplier Part Number 1=2057423, Supplier 1=Farnell
U4 U7: "VOM1271T -  Photovoltaic MOSFET Driver, Integrated Fast Turn-Off, Solid-State Relay 47µA Out, 24 µs Delay, SOP-4", Supplier Part Number 1=2395899, Supplier 1=Farnell
U5 U8: "MAX31855KASA+T -  Temperature Sensor IC, Thermocouple, Digital, ± 2°C, -200 °C, 1350 °C, NSOIC, 8 Pins", Supplier Part Number 1=2515622, Supplier 1=Farnell
U9 U10: "H11AA1SR2M -  Optocoupler, Transistor Output, 1 Channel, Surface Mount DIP, 6 Pins, 60 mA, 7.5 kV, 20 %", Supplier Part Number 1=2322525, Supplier 1=Farnell
U11: "TLP185(GR-TPL,SE(T -  Optocoupler, 1 Channel, SOP, 4 Pins, 50 mA, 3.75 kV, 100 %", Supplier Part Number 1=3014097, Supplier 1=Farnell
X1: library part M0000014, "CRYSTAL, 8M, 18PF CL, 6X3.6MM SMT", Supplier Part Number 1=1611803, Supplier 1=Farnell

## Free pads (board coordinates)
  round 2.5 hole 2.5: 18(7.7,51.05) 18(7.7,108.35) 18(63,8.65) 18(118.3,51.05) 18(118.3,108.35)
  round 1.524 hole 0.762: 19(31.96,90.89) 20(30.15,90.91)

## Via types
v1: diameter 1, hole 0.5, Top Layer to Bottom Layer, tented both sides, 191 vias
v2: diameter 1, hole 0.5, Top Layer to Bottom Layer, 58 vias
v3: diameter 1.27, hole 0.711, Top Layer to Bottom Layer, tented both sides, 21 vias
v4: diameter 0.8, hole 0.5, Top Layer to Bottom Layer, tented both sides, 3 vias
v5: diameter 0.8, hole 0.4, Top Layer to Bottom Layer, tented both sides, 1 vias

## Nets (pads, with @x,y where several pads share a name; then routed paths per layer and width w, separated by ;. In a path a pad name is that pad's centre, name@x,y a point inside that pad or via, vN(x,y) a via of type N, cw(c..) or ccw(c..) an arc to the next point about the centre after c; other vN are vias at no path point)
+3V3: "ST7735 1.44inch.2" "ST7920 GLCD (128×64).2" "ST7920 GLCD (128×64).7" BTN_DN.1 BTN_DN.4 BTN_OK.1 BTN_OK.4 BTN_ON/OFF.1 BTN_ON/OFF.4 BTN_UP.1 BTN_UP.4 C8.2 C13.2 C14.2 C15.2 C16.2 C17.2 C18.2 C22.2 C25.1 C29.2 C32.1 C37.1 C38.2 CB1.1 ENC1.4 L1.2 L6.2 pad.19 pad.20 PROG.3 R1.2 R9.2 R11.2 R12.2 R14.2 R15.2 R19.2 R20.1 R25.2 R26.1 R30.2 R31.2 R35.2 U1.1 U1.19 U1.32 U1.48 U1.64 U2.8 U3.8 U5.4 U6.8 U8.4 U11.4 | length 508.3
  Top Layer w0.3: BTN_ON/OFF.4@28.725,68.33 v3(28.825,68.43)
  Top Layer w0.6: BTN_OK.1@16.025,86.3 BTN_OK.4@24.675,86.3 30.69,86.3 ; v3(18.83,29.26) 19.99,29.26 v1@34.85,44.12 ; BTN_ON/OFF.1@20.075,68.33 BTN_ON/OFF.4@28.725,68.33 ; U8.4@21.11,19.825 21.11,20.92 21.41,21.22 22.69,21.22 v3(22.69,21.54) 22.95,21.28 28.9,21.28 v1(28.96,21.22) ; 27.45,56.51 v1(30.41,56.51) ; v1(34.34,50.84) 34.34,47.83 34.24,47.73 34.85,47.12 v1@34.85,44.32 ; 42.48,47.19 v1(42.48,52.21) ; v1(48.06,54.39) 50.21,54.39 ; ENC1.4@60.33,57.96 63.14,55.15 74.7,55.15 v3(78.52,51.33) 78.52,30.32 v3(78.53,30.31) 80.15,30.31 R19.2@80.22,30.24 ; v3(80.12,21.44) 80.15,21.47 C25.1@81.49,21.47 ; U5.4@81.49,20.155 C25.1@81.49,21.47 ; C25.1@81.49,21.55 C25.1@81.49,21.47 ; C25.1@81.5,21.47 C25.1@81.49,21.47 ; v3(95.26,68.3) 97.245,68.3 BTN_DN.1@97.275,68.33 BTN_DN.4@105.925,68.33 107.07,68.33 109.965,71.225 BTN_UP.4@109.965,86.3 BTN_UP.1@101.315,86.3
  Top Layer w1.5: pad.20@30.15,90.9 31.05,90 ; 31.05,90.86 31.05,90 ; 42.48,47.19 42.55,47.12 ; 50.21,54.39 50.31,54.49 ; 60.31,108.32 60.31,99.34 60.31,97 v3@34.965,71.655 ; ENC1.4@60.33,57.96 60.33,57.64 52.23,57.64 50.31,55.72 50.31,54.49 ; 31.05,90 31.05,75.57 31.06,75.56 ; 31.05,90 31.06,89.99 31.06,75.56 ; 31.06,75.56 31.06,75.54 34.955,71.645 v3@34.965,71.655 ; 31.06,75.56 v3@34.965,71.655 ; v3@34.965,71.655 37.16,69.46 37.16,65.5 35.58,63.92 31.27,63.92 27.45,60.1 27.45,56.51 27.45,51.82 32.15,47.12 34.85,47.12 42.55,47.12 ; 42.55,47.12 46.59,47.12 50.31,50.84 50.31,54.49
  Bottom Layer w0.3: C16.2@31.607,56.51 C16.2@31.647,56.47 ; C16.2@32.007,56.44 32.007,56.71 32.117,56.82 U1.19@33.799,56.82 ; v1(42.48,52.21) 42.25,52.21 42.22,52.24 43.277,52.24 43.287,52.25 U1.1@43.287,53.832
  Bottom Layer w0.35: C18.2@34.537,52.12 34.547,52.13 35.87,52.13 35.87,50.977 R1.2@36.157,50.69
  Bottom Layer w0.4: U1.64@45.275,55.76 45.275,55.122 46.027,54.37 C14.2@46.857,54.37 49.21,54.37 50.41,55.57 CB1.1@50.41,56.4
  Bottom Layer w0.5: U1.48@43.42,65.308 44.108,65.308 44.737,65.937 C13.2@44.737,66.86 ; R9.2@44.73,68.45 44.73,66.867 C13.2@44.737,66.86 ; PROG.3@48.03,72.75 49.51,71.27 49.51,69.62 48.81,68.92 47.57,68.92 45.51,66.86 C13.2@44.737,66.86
  Bottom Layer w0.6: v3(18.83,29.26) 18.83,25.4 v3(22.69,21.54) ; R26.1@28.57,19.38 R26.1@28.96,19.77 ; v3(28.825,68.43) 28.825,66.665 30.72,64.77 C15.2@32.197,64.77 32.55,64.77 33.12,64.2 v1(33.7,64.2) 33.799,64.101 33.799,63.5 ; v1(28.96,21.22) R26.1@28.96,19.77 ; R26.1@29.005,19.815 R26.1@28.96,19.77 ; v1(30.41,56.51) C16.2@31.607,56.51 ; U6.8@30.51,19.815 30.51,21.12 C29.2@30.52,21.13 ; v1(34.34,50.84) C18.2@34.34,51.657 ; C18.2@34.537,52.12 C18.2@34.57,52.087 ; v3(34.69,71.85) 35.585,72.745 PROG.3@47.272,72.745 ; U11.4@34.87,42.845 v1(34.87,44.27) ; R15.2@57.71,62.12 58.11,62.12 58.89,62.9 62.51,62.9 ; R12.2@57.93,41.17 58.01,41.09 R11.2@59.43,41.09 ; R12.2@57.99,41.13 57.99,43.85 60.33,46.19 ENC1.4@60.33,57.96 60.33,60.72 62.51,62.9 ; C8.2@59.09,67.83 59.146,67.774 U2.8@60.908,67.774 62.68,67.774 62.68,63.07 62.51,62.9 ; v3(78.52,51.33) 81.04,51.33 81.33,51.62 81.33,52.55 80.01,53.87 R35.2@80.01,56.34 78.25,56.34 77.46,57.13 77.46,61.75 84.01,68.3 v3(95.26,68.3) ; v3(78.53,30.31) 78.9,30.31 80.12,29.09 v3(80.12,21.44) 87.89,21.44 88.63,20.7 R20.1@88.63,19.38 R20.1@89.025,19.775 ; C22.2@90.08,21.12 90.48,20.72 U3.8@90.48,19.775
  Bottom Layer w0.65: R26.1@29.005,19.815 U6.8@30.51,19.815 ; R20.1@89.025,19.775 U3.8@90.48,19.775
  Bottom Layer w1: 60.31,99.34 60.31,97.69 61.02,96.98 72.01,96.98 72.81,97.78 72.81,99.34
  Bottom Layer w1.2: C37.1@27.95,90.94 33.66,90.94 L6.2@33.66,93.14
BTN_DN: BTN_DN.2 BTN_DN.3 C2.1 R3.2 U1.8 | length 86.2
  Top Layer w0.6: BTN_DN.2@97.275,72.83 v3(101.68,72.83) BTN_DN.3@105.925,72.83
  Bottom Layer w0.3: U1.8@39.787,53.832 39.787,56.127 43.5,59.84 43.5,63.536 44.174,64.21 44.91,64.21 48.44,67.74 50.71,67.74
  Bottom Layer w0.4: 50.71,67.74 51.96,66.49 55.12,66.49 58.95,70.32 91.69,70.32 94.2,72.83 v3(101.68,72.83)
  Bottom Layer w0.8: v3(101.68,72.83) 102.47,72.04 R3.2@102.47,69.93
BTN_OK: BTN_OK.2 BTN_OK.3 C4.1 R5.2 U1.10 | length 56.1
  Top Layer w0.6: BTN_OK.2@16.025,90.8 16.075,90.75 v3(21.34,90.75) 24.625,90.75 BTN_OK.3@24.675,90.8
  Bottom Layer w0.3: C4.1@21.27,89 C4.1@21.33,89.06 ; v3@21.33,90.74 v3(21.34,90.75) ; 31.74,67.52 33.65,65.61 34.076,65.61 36.856,62.83 39.55,62.83 40.46,61.92 40.46,58.09 38.787,56.417 U1.10@38.787,53.832
  Bottom Layer w0.4: R5.2@21.27,87.78 27.1,81.95 27.1,73.55 31.74,68.91 31.74,67.52
  Bottom Layer w0.6: R5.2@21.27,87.78 C4.1@21.27,89 ; C4.1@21.33,89.06 v3@21.33,90.74
BTN_ON/OFF: BTN_ON/OFF.2 BTN_ON/OFF.3 C5.1 R6.2 U1.11 | length 39.1
  Top Layer w0.6: BTN_ON/OFF.2@20.075,72.83 20.085,72.84 v3(25.22,72.84) 28.715,72.84 BTN_ON/OFF.3@28.725,72.83
  Bottom Layer w0.3: 30.93,67.6 33.32,65.21 33.91,65.21 36.74,62.38 39.41,62.38 40.03,61.76 40.03,58.3 38.287,56.557 U1.11@38.287,53.832
  Bottom Layer w0.4: R6.2@25.22,69.82 29.78,69.82 30.93,68.67 30.93,67.6
  Bottom Layer w0.6: R6.2@25.22,69.82 v3(25.22,72.84)
BTN_Rot: C10.1 ENC1.5 R17.2 U1.39 | length 38.8
  Top Layer w0.4: v1(42.15,62.78) 42.66,62.78 47.07,58.37 48.24,58.37 51.73,61.86 v1(65.32,61.86)
  Bottom Layer w0.3: U1.39@38.787,65.308 38.787,64.413 39.16,64.04 40.95,64.04 41.89,63.1 v1@42.13,63.1
  Bottom Layer w0.4: v1(65.32,61.86) 65.33,61.85 ENC1.5@65.33,57.96 65.38,57.91 C10.1@69,57.91
BTN_UP: BTN_UP.2 BTN_UP.3 C1.1 R2.2 U1.9 | length 97.1
  Top Layer w0.6: BTN_UP.2@101.315,90.8 101.345,90.77 v3(104.85,90.77) 104.88,90.8 BTN_UP.3@109.965,90.8
  Bottom Layer w0.3: U1.9@39.287,53.832 39.287,56.257 43.07,60.04 43.07,63.69 43.93,64.55 43.949,64.55 44.009,64.61 44.6,64.61 48.2,68.21 51.02,68.21
  Bottom Layer w0.4: 51.02,68.21 52.15,67.08 54.72,67.08 59.21,71.57 90.92,71.57 104.85,85.5 R2.2@104.85,87.83
  Bottom Layer w0.8: R2.2@104.85,87.83 v3(104.85,90.77)